# Altium PCB xARMtoR.PcbDoc
Units mm, origin at the board's own origin, x right, y up, seen from the top; angles counter-clockwise.
Board outline 28 x 26 mm, 2 copper layers (Top Layer, Bottom Layer); 6 components, 5 nets, 15 pads, 0 vias.
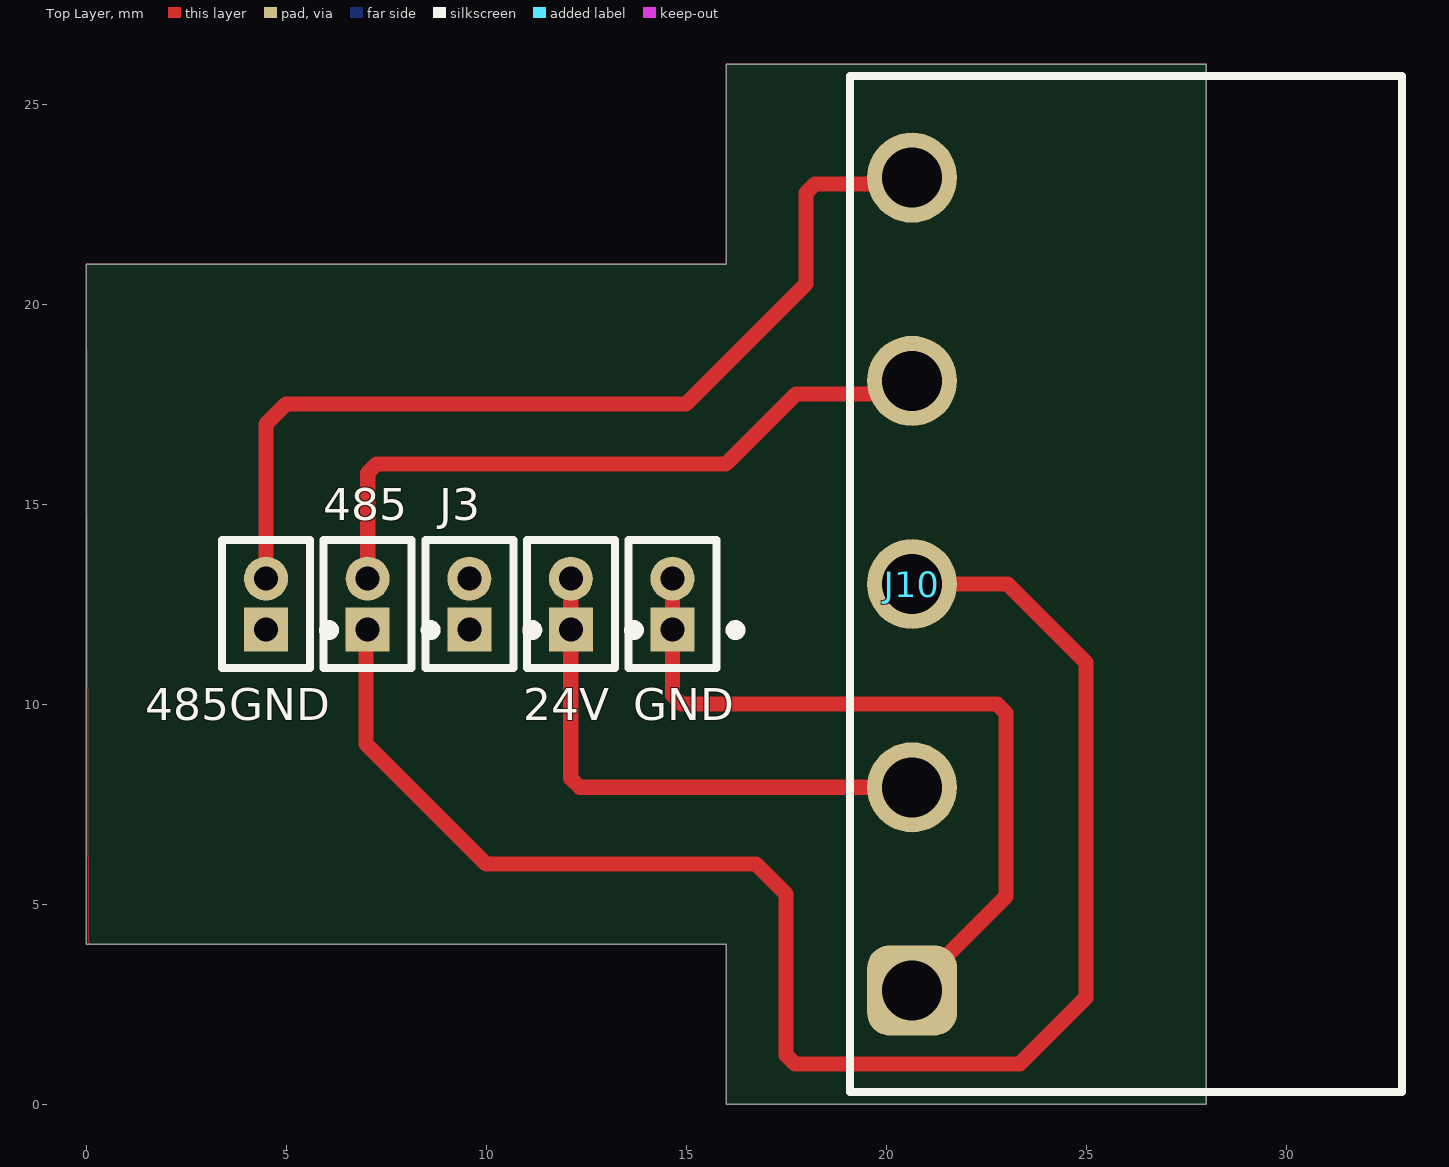
[diagram p0: Top Layer view]
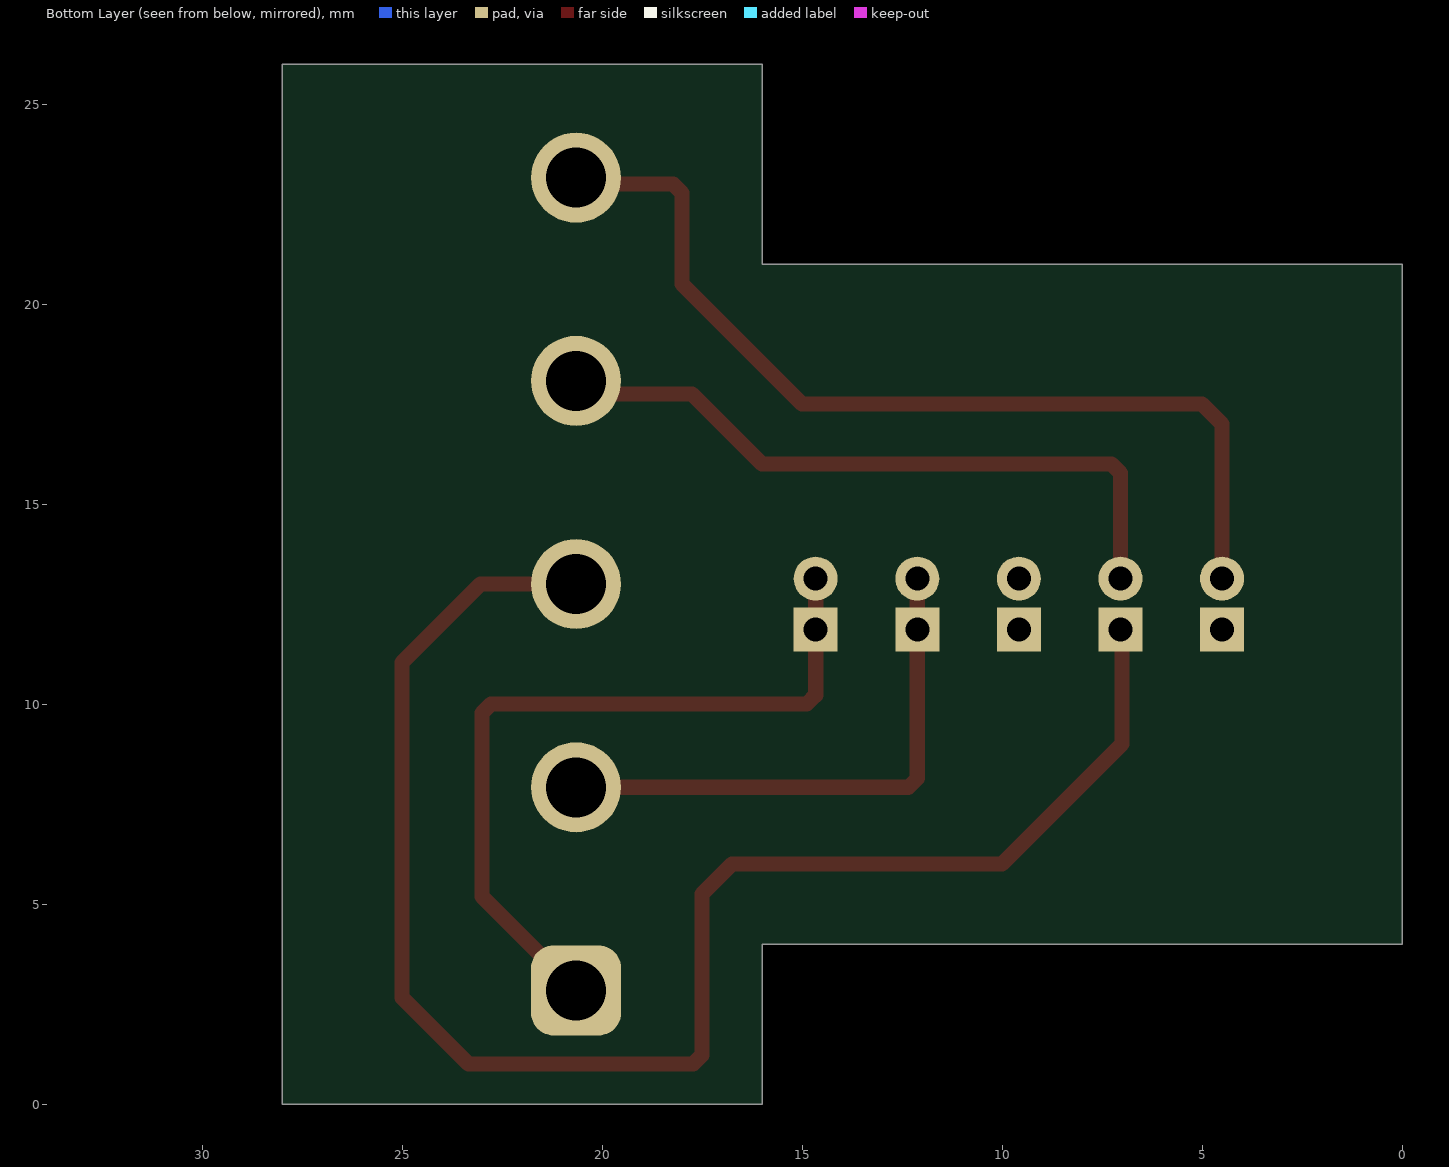
[diagram p1: Bottom Layer view, seen from below]
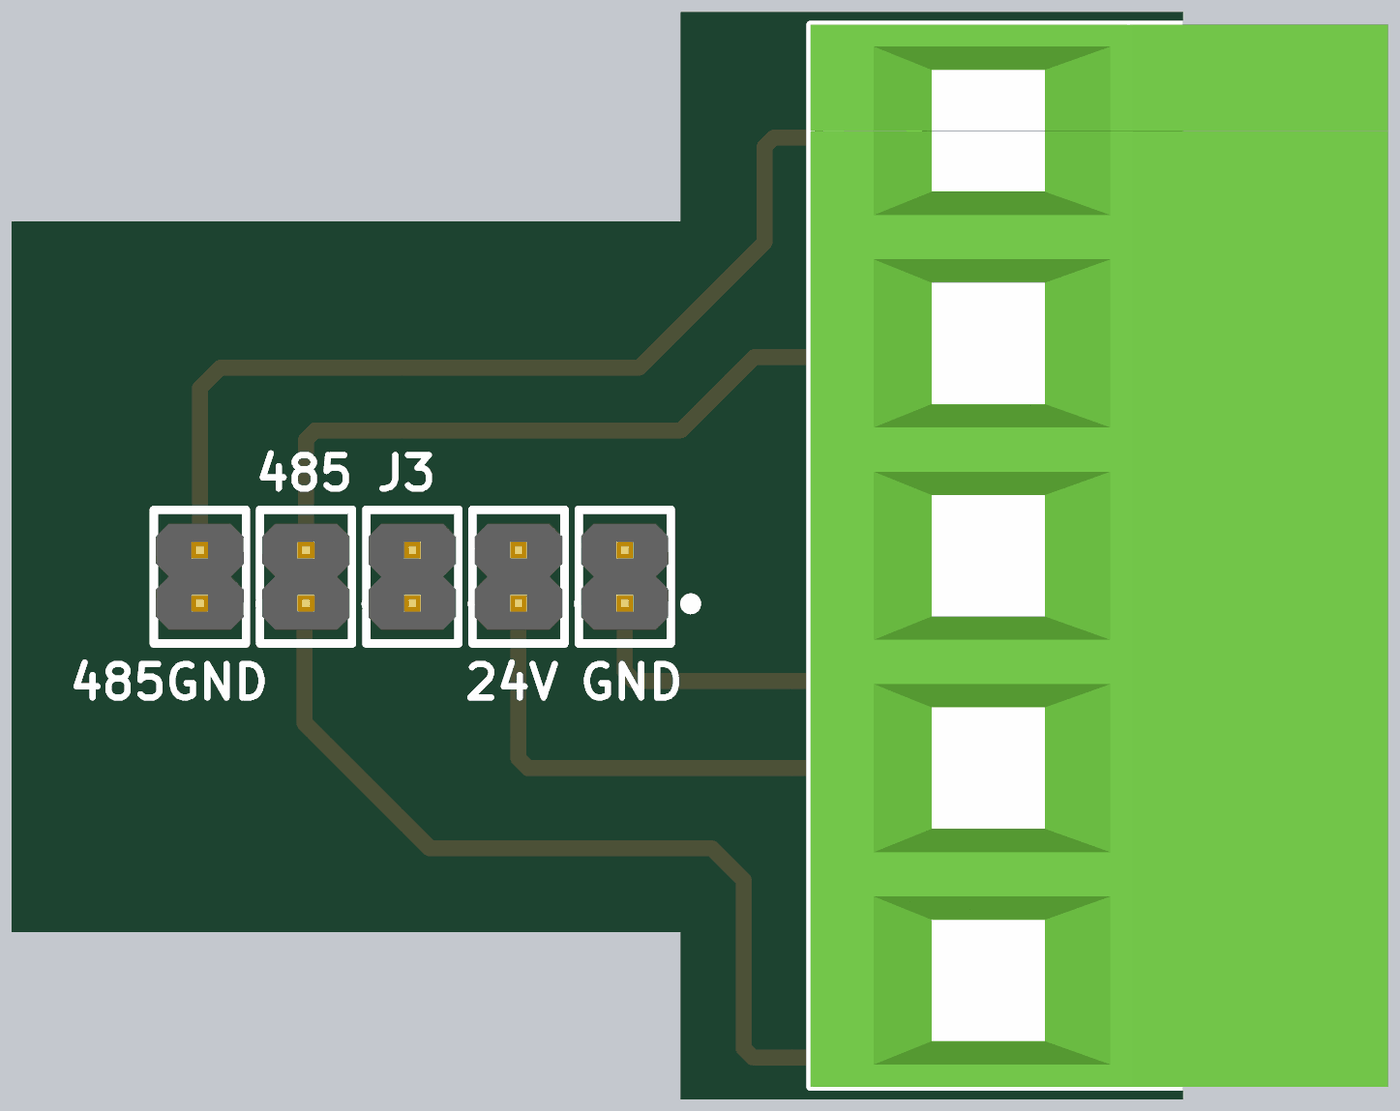
[diagram p2: 3D render of the assembled board from above, using the file's embedded part models]

## Layer stack, top to bottom
Top Solder: solder mask 0.0102, Solder Resist, Dk 3.5
Top Layer: signal copper 0.0356
Dielectric 1: dielectric 0.32, FR-4, Dk 4.8
Bottom Layer: signal copper 0.0356
Bottom Solder: solder mask 0.0102, Solder Resist, Dk 3.5

## Board outline
0,4 0,21 16,21 16,26 28,26 28,0 16,0 16,4

## Design rules (kind name [scope] priority, off if disabled: settings)
Clearance [All] p1: gap=0.3 ignorepadtopadclearanceinfootprint=FALSE
PolygonConnect [All] p1: connectstyle=Relief reliefconductorwidth=0.254 reliefentries=4 polygonreliefangle="90 Angle" airgapwidth=0.254
RoutingVias [All] p1: holewidth=0.3 width=0.6 viastyle="Through Hole" minholewidth=0.3 minwidth=0.6 maxholewidth=0.3 maxwidth=0.6
SilkToSolderMaskClearance [IsPad] p1: minsilkscreentomaskgap=0.15 clearancetoexposedcopper=TRUE
SolderMaskExpansion [All] p1: expansion=0.102 istentingtop=FALSE
UnRoutedNet [All] p1: checkbadconnections=TRUE
Width [All] p1: maxlimit=1 minlimit=0.3 preferedwidth=0.5
28 further rules are at their usual default settings.

## Components (designator, comment, footprint, x,y, rotation, side; value= is the part's Value field where it differs from the comment)
24V "M50-3530242" FP-M50-3530242-MFG 12.12,12.5 r90 top (schematic designator J2)
485 "M50-3530242" FP-M50-3530242-MFG 7.04,12.5 r90 top (schematic designator J4)
485GND "M50-3530242" FP-M50-3530242-MFG 4.5,12.5 r90 top (schematic designator J5)
GND "M50-3530242" FP-M50-3530242-MFG 14.66,12.5 r90 top (schematic designator J1)
J3 "M50-3530242" FP-M50-3530242-MFG 9.58,12.5 r90 top
J10 "691242500005" 691242500005 26,13 r90 top

## Footprints (in the part's own frame and the unit in brackets; to place one, negate y for a bottom-side part, rotate by r counter-clockwise, add the part's x,y. Pads: shape width x height; smd on the part's side, far side on the other; paste and mask are expansions set on the pad)
691242500005 [mm] "Serie 2425-5.08mm Vertical Cable Entry with Rising Cage Clamp, 5 pins"
  rrect50% 2.25x2.25 hole 1.5: 1(-10.16,5.35)
  round 2.25 hole 1.5: 2(-5.08,5.35) 3(0,5.35) 4(5.08,5.35) 5(10.16,5.35)
  silkscreen extent -12.7,-6.9 12.7,6.9, body extent -12.7,-6.9 12.71,6.9, height 9.9
FP-M50-3530242-MFG [mm]
  rect 1.1x1.1 hole 0.6 paste-2539.97 mask+0: 1(-0.635,0)
  round 1.1 hole 0.6 paste-2539.97 mask+0: 2(0.635,0)
  silkscreen extent -1.6,-1.7 1.6,1.1, body extent -1.62,-1.2 1.62,1.2, height 0.25

## Part data
24V 485 485GND GND J3: library part CMP-15831-000040-1, "CONN HEADER VERT 2POS 1.27MM"
J10: library part CMP-1502-02630-3, "Terminal Block, 5.08MM Pitch, Vertical, Rising Cage Clamp, 12-30 AWG, 5 Pin"

## Nets (pads, with @x,y where several pads share a name; then routed paths per layer and width w, separated by ;. In a path a pad name is that pad's centre, name@x,y a point inside that pad or via, vN(x,y) a via of type N, cw(c..) or ccw(c..) an arc to the next point about the centre after c; other vN are vias at no path point)
NetJ1_1: GND.1 GND.2 J10.1 | length 19.3
  Top Layer w0.381: GND.2 GND.1 14.66,10.223 14.883,10 22.777,10 23,9.777 23,5.19 J10.1
NetJ2_1: 24V.1 24V.2 J10.2 | length 13.6
  Top Layer w0.381: 24V.2 24V.1 12.12,8.143 12.343,7.92 J10.2
NetJ4_1: 485.1 J10.3 | length 40.8
  Top Layer w0.381: 485.1 7,11.825 7,9 10,6 16.75,6 17.5,5.25 17.5,1.223 17.723,1 23.34,1 25,2.66 25,11.041 23.041,13 J10.3
NetJ4_2: 485.2 J10.4 | length 17.2
  Top Layer w0.381: 485.2 7.04,15.777 7.263,16 16,16 17.75,17.75 20.32,17.75 J10.4
NetJ5_2: 485GND.2 J10.5 | length 23.9
  Top Layer w0.381: 485GND.2 4.5,17 5,17.5 15,17.5 18,20.5 18,22.777 18.223,23 20.49,23 J10.5
pads on no net: 485GND.1 J3.1 J3.2

## Polygon pours and split planes (outlines as drawn)
no net on Top Layer "NONET_L01_P000" (solid, pour order 0): 0.051,4.057 0.108,4 16,4 16,0 28,0 28,26 16,26 16,21 0,21